# Altium PCB PCB1.PcbDoc
Units mil, origin at the board's own origin, x right, y up, seen from the top; angles counter-clockwise.
Board outline 6000 x 4000 mil, 2 copper layers (Top Layer, Bottom Layer); 3 components, 3 nets, 7 pads, 0 vias.
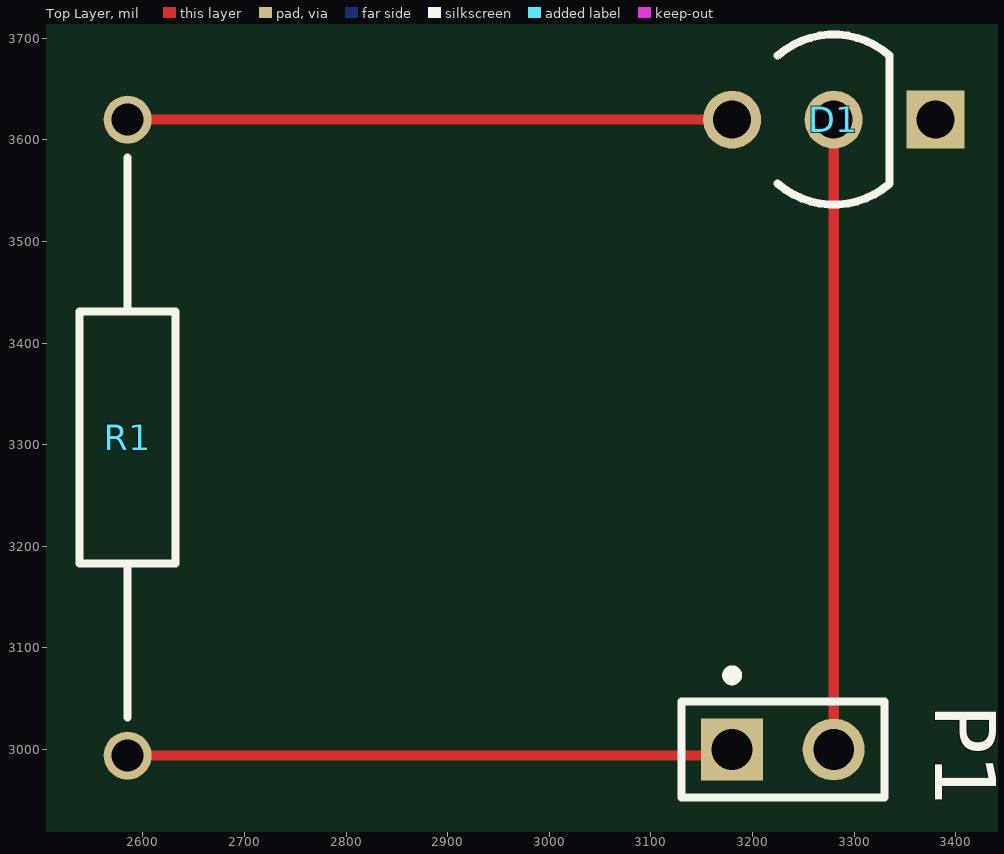
[diagram p0: Top Layer view]
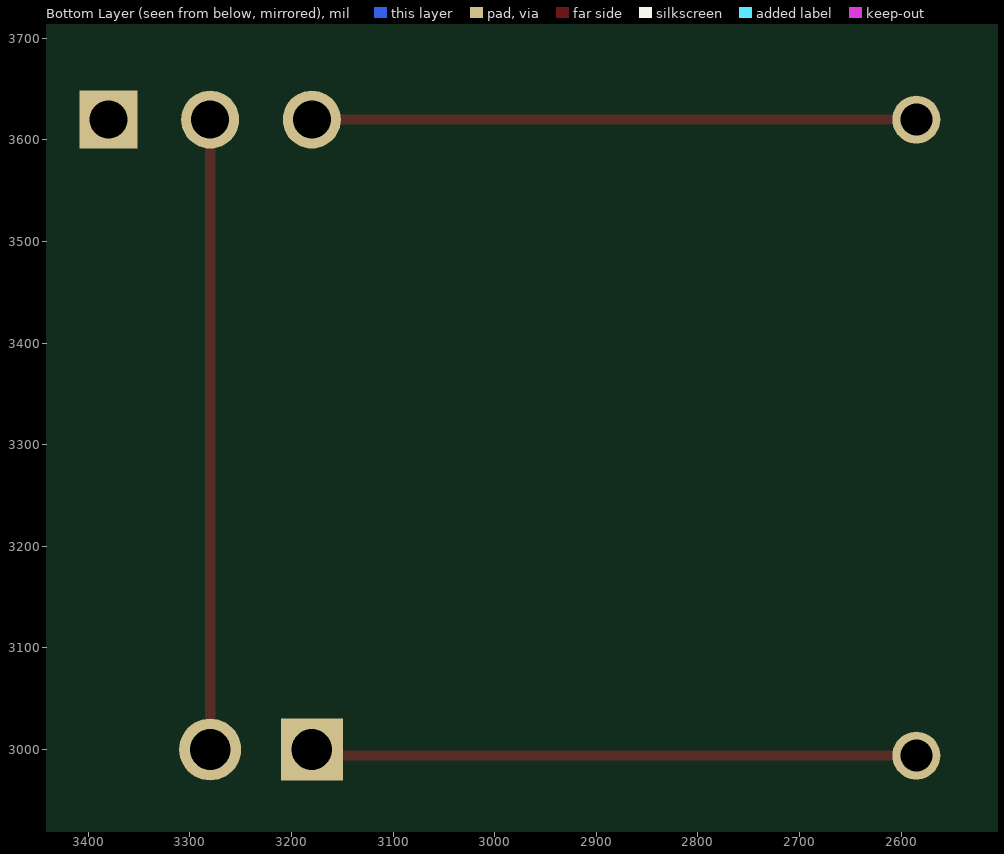
[diagram p1: Bottom Layer view, seen from below]

## Layer stack, top to bottom
Top Solder: solder mask 0.4, Solder Resist, Dk 3.5
Top Layer: signal copper 1.4
Dielectric 1: dielectric 12.6, FR-4, Dk 4.8
Bottom Layer: signal copper 1.4
Bottom Solder: solder mask 0.4, Solder Resist, Dk 3.5

## Board outline
1000,1000 7000,1000 7000,5000 1000,5000

## Design rules (kind name [scope] priority, off if disabled: settings)
Clearance [All] p1: gap=10 ignorepadtopadclearanceinfootprint=FALSE
PolygonConnect [All] p1: connectstyle=Relief reliefconductorwidth=10 reliefentries=4 polygonreliefangle="90 Angle" airgapwidth=10
RoutingVias [All] p1: holewidth=28 width=50 viastyle="Through Hole" minholewidth=28 minwidth=50 maxholewidth=28 maxwidth=50
SilkToSolderMaskClearance [IsPad] p1: minsilkscreentomaskgap=0 clearancetoexposedcopper=TRUE
SolderMaskExpansion [All] p1: expansion=0 istentingtop=FALSE
Width [All] p1: maxlimit=10 minlimit=10 preferedwidth=10
29 further rules are at their usual default settings.

## Components (designator, comment, footprint, x,y, rotation, side; value= is the part's Value field where it differs from the comment)
D1 "SSL-LX3059IGW-CA" FP-SSL-LX3059IGW-CA-MFG 3280,3620 r180 top
P1 "68000-102HLF" AMPH-68000-102HLF_V 3230,3000 r0 top
R1 "CFR-25JB-52-330R" RESAD1590W60L630D240 2585,2994.02 r90 top

## Footprints (in the part's own frame and the unit in brackets; to place one, negate y for a bottom-side part, rotate by r counter-clockwise, add the part's x,y. Pads: shape width x height; smd on the part's side, far side on the other; paste and mask are expansions set on the pad)
AMPH-68000-102HLF_V [mm] "THD, 2-Leads, Body 5.08x2.41mm, Pitch 2.54mm"
  rect 1.55x1.55 hole 1.02: 1(-1.27,0)
  round 1.55 hole 1.02: 2(1.27,0)
  silkscreen extent -2.54,-1.2 2.54,1.98, body extent -2.54,-1.2 2.54,1.2, height 8.38
FP-SSL-LX3059IGW-CA-MFG [mm]
  rect 1.45x1.45 hole 0.95 paste-2539.97 mask+0: 1(-2.54,0)
  round 1.45 hole 0.95 paste-2539.97 mask+0: 2(0,0) 3(2.54,0)
  silkscreen extent -1.4,-2.12 1.4,2.12, body extent -3.36,-2.22 3.36,2.22, height 0.25
RESAD1590W60L630D240 [mm]
  round 1.2 hole 0.8: 1(0,0) 2(15.9,0)
  silkscreen extent 0.95,-1.2 14.95,1.2, body extent -0.3,-1.29 16.2,1.29, height 2.6

## Part data
D1: library part CMP-57192-000011-1, "T-3MM BI-COLOR LED 635NM RED/", Color=Green, Forward Current=20mA, Forward Voltage=2.2V, Max Operating Temperature=85°C, Min Operating Temperature=-40°C, Package Quantity=1000, Illumination Color=Green, Lead Free="Lead Free", Lens Style=Dome, Luminous Intensity=30mcd, Mount="Through Hole", Number of LEDs=2, Number of Pins=3, Packaging=Bulk, RoHS Compliant=Yes, Viewing Angle=60°, Wavelength=635nm
P1: library part CMP-2000-05666-1, "Male Header, Pitch 2.54 mm, 1 x 2 Position, Height 8.38 mm, Tail Length 2.41 mm, RoHS, Bulk", Current Rating=3A, Flammability Rating=UL94V-0, Insulation Resistance=5000MOhms, Manufacturer=FCI, Operating Temperature Range=-65Cto+125C, Package Description="Male Header, Pitch 2.54 mm, 1 x 2 Position, Height 8.38 mm, Tail Length 2.41 mm", Voltage Rating=1.5kV, Brand=FCI, Contact Gender=Pin(Male), Contact Material=PhosphorBronze, Contact Plating=Gold/GTX, Datasheet URL=https://datasheet.ciiva.com/5149/68000-274228-5149165.pdf, Datasheet Version="Rev. F, 04/2006", Factory Pack Quantity=100, Housing Material=Thermoplastic, Manufacturer URL=http://www.amphenol.com/, Mating Post Length=5.84mm, Mounting Angle=Vertical, Mounting Style=ThroughHole, Mounting Technology=ThroughHole, Number of Positions=2, Number of Positions / Contacts=2, Number of Rows=1, Package Reference=68000-102HLF, Packaging=Bulk, Pitch=2.54mm, Product Category=Headers&WireHousings, Product Type=Headers, RoHS=Details, Series=68000, Termination Post Length=2.41mm, Termination Style=ThroughHole, Type=Unshrouded
R1: "Resistor", Manufacturer_Name="Yageo Group", Mouser Part Number=603-CFR-25JB-52-330R, Datasheet Link=https://www.yageo.com/upload/media/product/productsearch/datasheet/lr/YAGEO%20CFR_datasheet_2021v0.pdf, Manufacturer_Part_Number=CFR-25JB-52-330R, Mouser Price/Stock=https://www.mouser.co.uk/ProductDetail/YAGEO/CFR-25JB-52-330R?qs=oypCK0zG327zv8pBwGe%252BbQ%3D%3D

## Nets (pads, with @x,y where several pads share a name; then routed paths per layer and width w, separated by ;. In a path a pad name is that pad's centre, name@x,y a point inside that pad or via, vN(x,y) a via of type N, cw(c..) or ccw(c..) an arc to the next point about the centre after c; other vN are vias at no path point)
NetD1_2: D1.2 P1.2 | length 620
  Top Layer w10: P1.2 D1.2
NetD1_3: D1.3 R1.2 | length 595
  Top Layer w10: R1.2 D1.3
NetP1_1: P1.1 R1.1 | length 597.5
  Top Layer w10: R1.1 3174.02,2994.02 P1.1
pads on no net: D1.1